# EAGLE board Cerdas F2 rev1 (EAGLE 9.0.1)
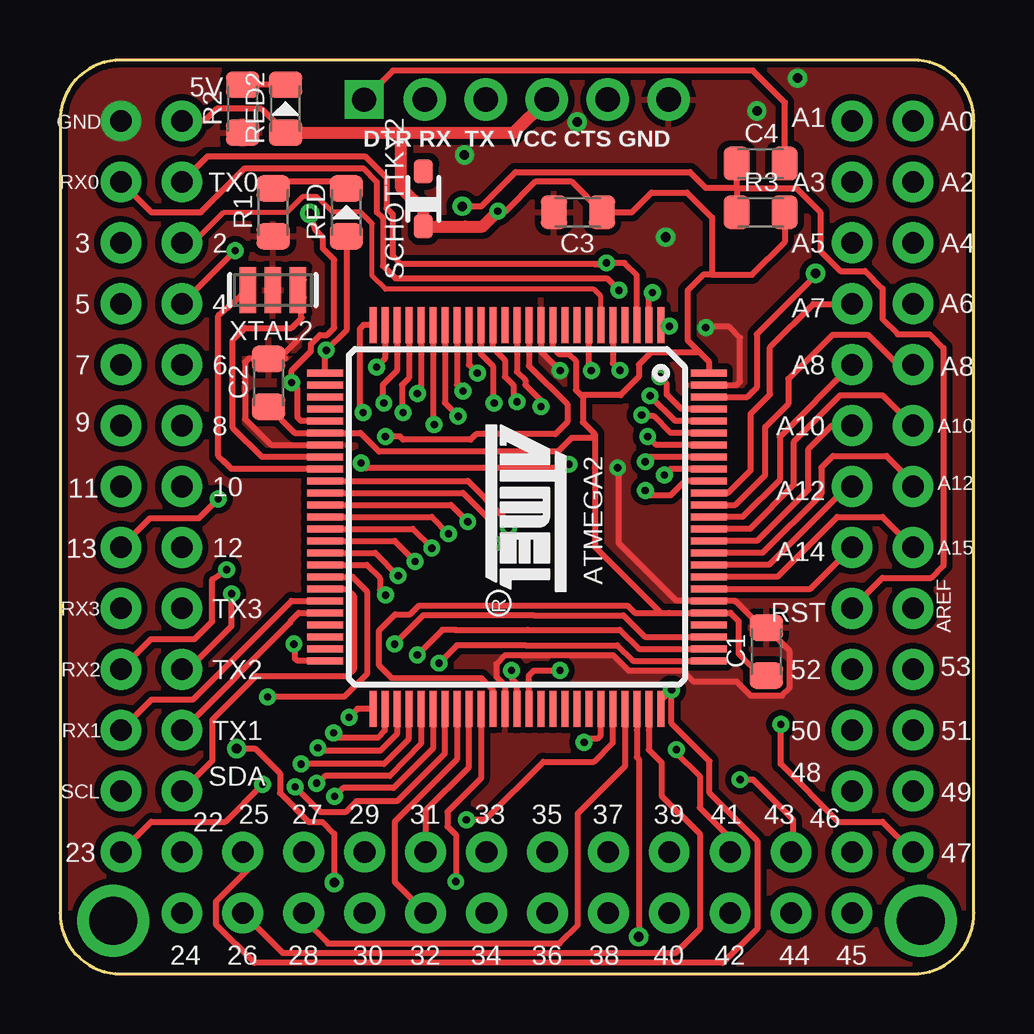
[diagram p0: board, top side]
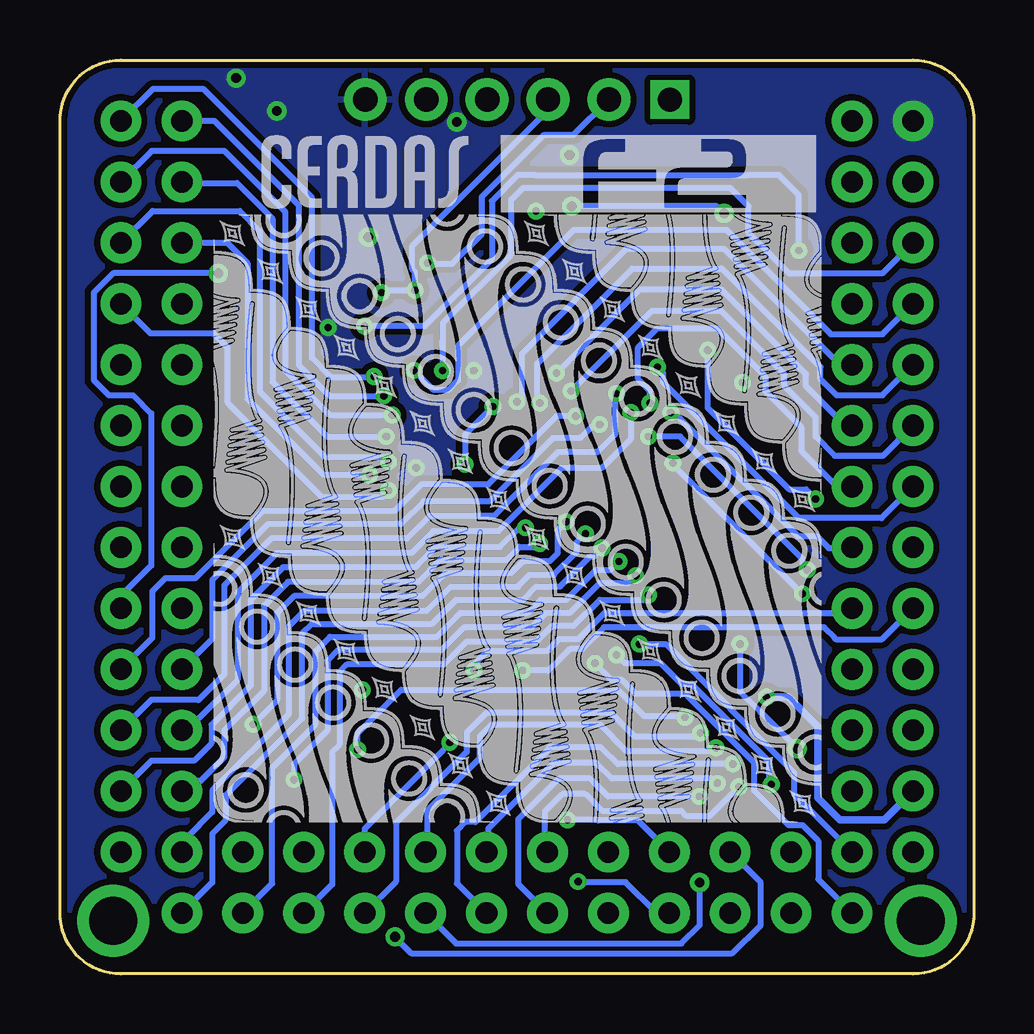
[diagram p1: board, bottom side, seen from below]

Size 38.1 x 38.1 mm. Coordinates in mm from the lower left corner, seen from the top.
Outline: 0,35.56 0,2.54 arc90 2.54,0 35.56,0 arc90 38.1,2.54 38.1,35.56 arc90 35.56,38.1 2.54,38.1 arc90 0,35.56
Copper layers (1*16): Top 0.035mm / dielectric 1.5mm / Bottom 0.035mm
Design rules "DFRobot_Eagle_Rule_v0.4": minimum track width 6mil, minimum drill 12mil, track to track 6mil, track to pad 6mil, pad to pad 6mil, via to via 6mil, smd to smd 0mil, copper to edge 10mil, drill to drill 10mil, minimum pad ring 12mil, minimum via ring 8mil, stop-mask expansion 2mil, vias tented up to drill 25mil, thermal gap 10mil

## Footprints (pad centres in the part's own frame; a part is rotated, then mirrored left to right if it is on the bottom)
TQFP100 = smd 1.5 x 0.3: 1 -8,6; 2 -8,5.5; 3 -8,5; 4 -8,4.5; 5 -8,4; 6 -8,3.5; 7 -8,3; 8 -8,2.5; 9 -8,2; 10 -8,1.5; 11 -8,1; 12 -8,0.5; 13 -8,0; 14 -8,-0.5; 15 -8,-1; 16 -8,-1.5; 17 -8,-2; 18 -8,-2.5; 19 -8,-3; 20 -8,-3.5; 21 -8,-4; 22 -8,-4.5; 23 -8,-5; 24 -8,-5.5; 25 -8,-6; 51 8,-6; 52 8,-5.5; 53 8,-5; 54 8,-4.5; 55 8,-4; 56 8,-3.5; 57 8,-3; 58 8,-2.5; 59 8,-2; 60 8,-1.5; 61 8,-1; 62 8,-0.5; 63 8,0; 64 8,0.5; 65 8,1; 66 8,1.5; 67 8,2; 68 8,2.5; 69 8,3; 70 8,3.5; 71 8,4; 72 8,4.5; 73 8,5; 74 8,5.5; 75 8,6 | smd 0.3 x 1.5: 26 -6,-8; 27 -5.5,-8; 28 -5,-8; 29 -4.5,-8; 30 -4,-8; 31 -3.5,-8; 32 -3,-8; 33 -2.5,-8; 34 -2,-8; 35 -1.5,-8; 36 -1,-8; 37 -0.5,-8; 38 0,-8; 39 0.5,-8; 40 1,-8; 41 1.5,-8; 42 2,-8; 43 2.5,-8; 44 3,-8; 45 3.5,-8; 46 4,-8; 47 4.5,-8; 48 5,-8; 49 5.5,-8; 50 6,-8; 76 6,8; 77 5.5,8; 78 5,8; 79 4.5,8; 80 4,8; 81 3.5,8; 82 3,8; 83 2.5,8; 84 2,8; 85 1.5,8; 86 1,8; 87 0.5,8; 88 0,8; 89 -0.5,8; 90 -1,8; 91 -1.5,8; 92 -2,8; 93 -2.5,8; 94 -3,8; 95 -3.5,8; 96 -4,8; 97 -4.5,8; 98 -5,8; 99 -5.5,8; 100 -6,8
SMD-0805 = smd 1.1 x 1.4: 1 -1,0; 2 1,0
SMD-0805-LED = smd 1.1 x 1.4: 1 -1,0; 2 1,0
SOD-323 = smd 1 x 0.8: A 1.15,0; C -1.15,0
CON-FTDI-NOSILK = drill 1.016 pad 1.778: CTS 3.81,0; GND 6.35,0; RXI -1.27,0; TX0 -3.81,0; VCC 1.27,0 | drill 1 square: DTR -6.35,0
CSTCE* = smd 0.7 x 1.905: 1 -1.041,0; 2 0,0; 3 1.041,0

## Placement (x,y rotation side)
ATMEGA2  ATMEGA2560  [TQFP100]  19.05,19.05 270 top
C1  [SMD-0805]  29.45,13.44 90 top
C2  .1uF  [SMD-0805]  8.69,24.64 90 top
C3  .1uF  [SMD-0805]  21.59,31.75 180 top
C4  .1uF  [SMD-0805]  29.21,33.78 0 top
R1  10k  [SMD-0805]  8.89,31.75 90 top
R2  10k  [SMD-0805]  7.62,36.07 90 top
R3  10k  [SMD-0805]  29.21,31.75 0 top
RED  L  [SMD-0805-LED]  11.94,31.75 90 top
RED2  L  [SMD-0805-LED]  9.4,36.07 90 top
SCHOTTKY2  DIODE  [SOD-323]  15.15,32.31 90 top
U$1  FRAME  [A4-HOR]  -0.25,-0.13 0 top
U$2  CON-FTDI-DIP-NOSILK  [CON-FTDI-NOSILK]  19.02,36.45 0 top
U$4  LOGO-CERDASF2-BPLACE  [CERDAS-F2-SILK]  6.35,6.35 0 top
XTAL2  16M  [CSTCE*]  8.87,28.51 180 top

## Library data of the parts
ATMEGA2 C1-C4 R1-R3 RED RED2 SCHOTTKY2 = Fuzzy
U$1 U$2 U$4 XTAL2 = geraicerdas

## Nets
2: ATMEGA2.6
3: ATMEGA2.7
4: ATMEGA2.1
5: ATMEGA2.5
6: ATMEGA2.15
7: ATMEGA2.16
8: ATMEGA2.17
9: ATMEGA2.18
10: ATMEGA2.23
11: ATMEGA2.24
12: ATMEGA2.25
13: ATMEGA2.26 RED.1
22: ATMEGA2.78
23: ATMEGA2.77
24: ATMEGA2.76
25: ATMEGA2.75
26: ATMEGA2.74
27: ATMEGA2.73
28: ATMEGA2.72
29: ATMEGA2.71
30: ATMEGA2.60
31: ATMEGA2.59
32: ATMEGA2.58
33: ATMEGA2.57
34: ATMEGA2.56
35: ATMEGA2.55
36: ATMEGA2.54
37: ATMEGA2.53
38: ATMEGA2.50
39: ATMEGA2.70
40: ATMEGA2.52
41: ATMEGA2.51
42: ATMEGA2.42
43: ATMEGA2.41
44: ATMEGA2.40
45: ATMEGA2.39
46: ATMEGA2.38
47: ATMEGA2.37
48: ATMEGA2.36
49: ATMEGA2.35
50: ATMEGA2.22
51: ATMEGA2.21
52: ATMEGA2.20
53: ATMEGA2.19
+5V: ATMEGA2.10 ATMEGA2.31 ATMEGA2.61 ATMEGA2.80 ATMEGA2.100 C1.1 C2.1 C3.1 R3.2 RED2.1 SCHOTTKY2.C U$2.VCC
A0: ATMEGA2.97
A1: ATMEGA2.96
A2: ATMEGA2.95
A3: ATMEGA2.94
A4: ATMEGA2.93
A5: ATMEGA2.92
A7: ATMEGA2.90
A8: ATMEGA2.89
A9: ATMEGA2.88
A10: ATMEGA2.87
A11: ATMEGA2.86
A12: ATMEGA2.85
A13: ATMEGA2.84
AREF: ATMEGA2.98
DTR: C4.2 U$2.DTR
GND: ATMEGA2.11 ATMEGA2.32 ATMEGA2.62 ATMEGA2.81 ATMEGA2.99 C1.2 C2.2 C3.2 R1.1 R2.1 U$2.GND XTAL2.2
GSM_PWR_ON: ATMEGA2.91
N$1: ATMEGA2.34 XTAL2.3
N$2: ATMEGA2.33 XTAL2.1
N$3: R1.2 RED.2
N$10: R2.2 RED2.2
RST: ATMEGA2.30 C4.1 R3.1
RX0: ATMEGA2.2 U$2.RXI
RX1: ATMEGA2.45
RX2: ATMEGA2.12
RX3: ATMEGA2.63
RX_GSM_H: ATMEGA2.83
SCL: ATMEGA2.43
SDA: ATMEGA2.44
TX0: ATMEGA2.3 U$2.TX0
TX1: ATMEGA2.46
TX2: ATMEGA2.13
TX3: ATMEGA2.64
TX_GSM_H: ATMEGA2.82
VUSB: SCHOTTKY2.A

## Tracks (layer width: path | path; a pad name or v marks a point on that pad's centre or on a via)
2  (via drill 0.9 pad 1.7)
  Top 0.2: ATMEGA2.6 22.55,28.25 22.25,28.55 13.56,28.55 13.02,29.09 13.02,31.28 12.54,31.75 11.36,31.75 10.71,32.41 10.12,32.41 9.46,31.75 6.83,31.75 5.56,30.48 v5.08,30.48
3  (via drill 0.3 pad 0.5, 0.9 pad 1.7)
  Top 0.25: ATMEGA2.7 22.05,25.25 v22.15,25.15
  Bottom 0.25: 7.7,29.2 3.82,29.2 v2.54,30.48 | 22.05,25.25 v22.15,25.15 22.15,26.16 22.15,26.4
  Bottom 0.254: 7.7,29.2 9.4,30.9 9.4,32 10.16,32.77 18.8,32.77 19.3,32.26 19.3,29.97 22.15,27.13 22.15,26.16
4  (via drill 0.3 pad 0.5, 0.9 pad 1.7)
  Top 0.25: v25.4,27 25.1,27 ATMEGA2.1
  Top 0.254: v5.08,27.94 v5.09,27.94 v7.3,30.15
  Bottom 0.25: v25.4,27 22.9,27 20.1,29.8 20.1,31.24 20.1,31.5 | 18.3,33.3 18.29,33.3 9.43,33.3
  Bottom 0.254: 9.43,33.3 8.13,33.3 7.3,32.47 v7.3,30.15 | 18.29,33.3 19.02,33.3 20.1,32.22 20.1,31.24
5  (via drill 0.3 pad 0.5, 0.9 pad 1.7)
  Top 0.25: ATMEGA2.5 23.05,26.05
  Top 0.254: 23.05,26.05 23.05,25.46 v23.35,25.16
  Bottom 0.25: 21.9,24.35 21.5,24.75 21.5,26.2 16.68,31.02 10.32,31.02 5.97,26.67 3.81,26.67 v2.54,27.94
  Bottom 0.254: 21.9,24.35 22.53,24.35 v23.35,25.16
6  (via drill 0.3 pad 0.5, 0.9 pad 1.7)
  Top 0.25: v19.05,23.85 18.9,24 18.9,24.55 18.55,24.9 18.55,25.6 18.05,26.1 ATMEGA2.15
  Bottom 0.25: v5.08,25.4 5.6,25.4 10.43,30.23 14.48,30.23 18.85,25.86 18.85,24.05 v19.05,23.85
7  (via drill 0.3 pad 0.5, 0.9 pad 1.7)
  Top 0.25: ATMEGA2.16 17.55,25.85 18.05,25.35 18.05,23.85 v18.1,23.8
  Bottom 0.25: v18.1,23.8 18.2,23.9 18.2,25.45 14.24,29.41 10.51,29.41 6.4,25.3 6.4,24.8 5.73,24.13 3.81,24.13 v2.54,25.4
8  (via drill 0.3 pad 0.5, 0.9 pad 1.7)
  Top 0.25: ATMEGA2.17 17.05,25.4 v17.4,25.05
  Bottom 0.25: v5.08,22.86 5.36,22.86 7,24.5 7,25 10.54,28.54 13.92,28.54 15.89,26.57 15.89,26.56 v17.4,25.05
9  (via drill 0.3 pad 0.5, 0.9 pad 1.7)
  Top 0.25: ATMEGA2.18 16.55,24.55 v16.8,24.3
  Bottom 0.25: v16.8,24.3 15.2,25.9 15.18,25.9 13.43,27.65 10.55,27.65 7.9,25 7.9,24.5 6.6,23.2 6.6,22.4 5.8,21.6 3.8,21.6 v2.54,22.86
10  (via drill 0.3 pad 0.5, 0.9 pad 1.7)
  Top 0.25: ATMEGA2.23 14.05,25.15 13.45,24.55 13.45,23.85 v13.5,23.8
  Bottom 0.25: v13.5,23.8 13.5,24.3 14,24.8 14,26.12 13.2,26.92 10.72,26.92 8.7,24.9 8.7,24.3 7.2,22.8 7.2,21.8 5.7,20.3 5.1,20.3 v5.08,20.32
11  (via drill 0.3 pad 0.5, 0.9 pad 1.7)
  Top 0.25: ATMEGA2.24 13.55,25.65 v13.2,25.3 13.15,25.35
  Bottom 0.25: v13.2,25.3 12.95,25.05 12.95,24.65 7.3,19 3.86,19 v2.54,20.32
12  (via drill 0.3 pad 0.5, 0.9 pad 1.7)
  Top 0.25: ATMEGA2.25 12.65,27.05 12.5,26.9 12.5,23.3
  Top 0.254: v12.64,23.41 12.5,23.29 12.5,23.3
  Bottom 0.25: 12.05,22.95 7.35,18.25 6.55,18.25 6.05,17.75 5.11,17.75 v5.08,17.78
  Bottom 0.254: 12.05,22.95 12.25,23.15 v12.64,23.41
13  (via drill 0.3 pad 0.5, 0.9 pad 1.7)
  Top 0.25: v2.54,17.78 3.76,19 5.8,19 v6.6,19.8 | ATMEGA2.26 11.05,25.95 v11.1,26
  Top 0.254: RED.1 11.94,26.84 v11.1,26
  Bottom 0.25: 11.2,25.9 v11.1,26 11.1,23.6 7.7,20.2 7,20.2 v6.6,19.8
22  (via drill 0.3 pad 0.5, 0.9 pad 1.7)
  Top 0.25: 24.38,14.05 ATMEGA2.78 | 19.75,14.95 15.65,14.95
  Top 0.254: 19.75,14.95 23.48,14.95 24.38,14.05 | 15.65,14.95 15.14,14.95 v13.94,13.75
  Bottom 0.25: v13.94,13.75 12.85,13.75 | 7.5,8.38 7.5,7.5 v5.08,5.08
  Bottom 0.254: 12.85,13.75 7.5,8.4 7.5,8.38
23  (via drill 0.3 pad 0.5, 0.9 pad 1.7)
  Top 0.25: 24.13,13.55 ATMEGA2.77 | 16.45,14.35 16.51,14.35 19.5,14.35 | v2.54,5.08 3.81,6.35 6.9,6.35 v8.45,7.9
  Top 0.254: 19.5,14.35 23.33,14.35 24.13,13.55 | 16.51,14.35 15.94,14.35 v14.9,13.3
  Bottom 0.25: 8.55,8.38 8.55,8 v8.45,7.9
  Bottom 0.254: 8.55,8.38 8.55,8.87 11.77,12.09 12.19,12.09 13.05,12.95 14.54,12.95 v14.9,13.3
24  (via drill 0.3 pad 0.5, 0.9 pad 1.7)
  Top 0.25: 23.88,13.05 ATMEGA2.76 | 19.4,13.7 16.55,13.7
  Top 0.254: 19.4,13.7 23.23,13.7 23.88,13.05 | 16.55,13.7 16.54,13.7 v15.8,12.95
  Bottom 0.254: v5.08,2.54 6.49,3.95 6.49,5.55 7.15,6.21 7.73,6.21 9.17,7.64 9.17,8.81 11.94,11.58 11.94,11.68 14.11,11.68 14.68,12.25 15.1,12.25 v15.8,12.95
25  (via drill 0.3 pad 0.5, 0.9 pad 1.7)
  Top 0.25: ATMEGA2.75 25.05,11.4 v25.5,11.85
  Top 0.254: v25.5,11.85 25.5,10.45 27.07,8.87 27.07,7.54 29.07,5.55 29.07,1.89 27.63,0.46 8.11,0.46 6.49,2.07 6.49,3.01 8.09,4.61 v7.62,5.08
26  (via drill 0.9 pad 1.7)
  Top 0.25: ATMEGA2.74 24.55,10.16
  Top 0.254: v7.62,2.54 9.3,0.86 25.65,0.86 26.67,1.88 26.67,5.84 25.08,7.43 25.08,8.81 24.55,9.34 24.55,10.16
27  (via drill 0.4, 0.9 pad 1.7)
  Top 0.25: ATMEGA2.73 24.05,10.16
  Top 0.254: v24.13,1.55 24.13,8.95 24.05,9.03 24.05,10.16
  Bottom 0.254: 24.13,1.52 v24.13,1.55 | 23.88,1.27 arc90 24.13,1.52 | 23.88,1.27 24.13,1.52 | 23.88,1.27 23.47,0.86 10.06,0.86 8.89,2.03 8.89,3.81 v10.16,5.08
28  (via drill 0.9 pad 1.7)
  Top 0.25: ATMEGA2.72 23.55,8.65 22.18,7.28 22.1,7.2
  Top 0.254: v10.16,2.54 10.16,2.29 11.18,1.27 20.83,1.27 21.59,2.03 21.59,6.69 22.18,7.28
29  (via drill 0.3 pad 0.5, 0.9 pad 1.7)
  Top 0.25: ATMEGA2.71 23.05,9.65 22.25,8.85 20.15,8.85 17.72,6.42 v16.94,6.42
  Bottom 0.254: v12.7,5.08 14.02,6.4 15.67,6.4 15.69,6.42 v16.94,6.42
30  (via drill 0.3 pad 0.5, 0.9 pad 1.7)
  Top 0.25: 16.45,3.9 v16.5,3.85 16.5,5.8 16.15,6.15 16.15,6.75 17.55,8.15 ATMEGA2.60
  Bottom 0.25: v12.7,2.54 13.24,2.54 14.52,3.82 16.47,3.82 v16.5,3.85
31  (via drill 0.9 pad 1.7)
  Top 0.25: 15.2,5.12 v15.24,5.08 15.24,6.81 17.05,8.62 ATMEGA2.59
32  (via drill 0.9 pad 1.7)
  Top 0.25: ATMEGA2.58 16.55,8.95 13.95,6.35 13.95,3.83 v15.24,2.54
33  (via drill 0.3 pad 0.5, 0.9 pad 1.7)
  Top 0.25: ATMEGA2.57 16.05,9.2 14.05,7.2 12.36,7.2 11.9,6.74 10.86,6.74 v9.8,7.8
  Bottom 0.25: v17.78,5.08 17.9,5.2 17.9,6.75 17.15,7.5 16.2,7.5 15.5,6.8 12.2,6.8 12,6.6 11,6.6 v9.8,7.8
34  (via drill 0.3 pad 0.5, 0.9 pad 1.7)
  Top 0.25: ATMEGA2.56 15.55,9.4 13.9,7.75 11.8,7.75 v11.45,7.4 11.5,7.45
  Bottom 0.25: v11.45,7.4 15.25,7.4 16,8.15 17.3,8.15 19,6.45 19,3.76 v17.78,2.54
35  (via drill 0.3 pad 0.5, 0.9 pad 1.7)
  Top 0.25: ATMEGA2.55 15.05,9.6 13.75,8.25 11.05,8.25 v10.7,7.95
  Bottom 0.25: v20.32,5.08 20.25,5.15 20.25,6.05 17.5,8.8 15.75,8.8 15.1,8.15 10.9,8.15 v10.7,7.95
36  (via drill 0.3 pad 0.5, 0.9 pad 1.7)
  Top 0.25: v10.05,8.75 13.5,8.75 14.55,9.8 ATMEGA2.54
  Bottom 0.25: v10.05,8.75 14.85,8.75 15.55,9.45 17.7,9.45 17.7,9.41 20.78,6.33 21.19,6.33 21.55,5.97 21.55,3.77 v20.32,2.54
37  (via drill 0.3 pad 0.5, 0.9 pad 1.7)
  Top 0.25: ATMEGA2.53 14.05,10 13.35,9.3 10.95,9.3 v10.75,9.42
  Bottom 0.25: v22.86,5.08 22.8,5.14 22.8,6.8 20.6,9 20.6,9.9 20.1,10.4 15.6,10.4 14.5,9.3 10.95,9.3 v10.75,9.42
38  (via drill 0.3 pad 0.5, 0.4, 0.9 pad 1.7)
  Top 0.25: ATMEGA2.50 9.9,13.05 9.8,13.15 9.8,13.7 v9.75,13.75
  Top 0.254: v7.37,9.4 8.13,9.4 9.17,8.36 9.17,7.54 10.37,6.33 10.94,6.33 11.43,5.84 v11.43,3.81
  Bottom 0.254: v7.37,9.4 8.89,10.92 8.91,10.92 9.75,11.76 v9.75,13.75 | v22.86,2.54 21.59,1.27 12.19,1.27 11.43,2.03 v11.43,3.81
39  (via drill 0.3 pad 0.5, 0.9 pad 1.7)
  Top 0.25: v21.85,9.65 22,9.8 22.4,9.8 22.55,9.95 ATMEGA2.70
  Bottom 0.25: v21.85,9.65 22.15,9.3 25.4,6.05 v25.4,5.08
40  (via drill 0.3 pad 0.5, 0.9 pad 1.7)
  Top 0.25: v11.4,10.05 11.6,9.85 13.25,9.85 13.55,10.15 ATMEGA2.52
  Bottom 0.25: v25.4,2.54 24.1,3.84 24.1,6.3 21.15,9.25 21.15,10.05 20.3,10.9 15.15,10.9 14.15,9.9 11.55,9.9 v11.4,10.05
41  (via drill 0.3 pad 0.5, 0.9 pad 1.7)
  Top 0.25: ATMEGA2.51 12.4,11.05 v12.05,10.7 | v27.94,5.08 27.94,5.66 26.67,6.93 26.67,8.26 25.7,9.23 v25.7,9.35
  Bottom 0.25: v12.05,10.7 12.1,10.75 13.75,10.75 14.85,11.85 23.88,11.85 | 25.6,9.45 v25.7,9.35
  Bottom 0.254: v25.7,9.35 25.7,10.03 23.88,11.85
42  (via drill 0.3 pad 0.5, 0.9 pad 1.7)
  Top 0.25: ATMEGA2.42 12.79,17.05 13.34,16.5 13.34,16.02 v13.57,15.79
  Bottom 0.25: v27.94,2.54 26.75,3.73 26.75,9.25 26.45,9.55 26.45,12.6 26.15,12.9 22.1,12.9 21.15,13.85 18.25,13.85 17.6,14.5 16.7,14.5 15.6,15.6 13.76,15.6 v13.57,15.79
43  (via drill 0.3 pad 0.5, 0.9 pad 1.7)
  Top 0.25: ATMEGA2.41 13.15,17.55 v14.1,16.6 14.05,16.65 | v30.48,5.08 30.55,5.15 30.55,6.45 28.9,8.1 v28.35,8.1
  Bottom 0.25: v28.35,8.1 28.35,8.75 26.95,10.15 26.95,13.05 26.5,13.5 22.2,13.5 21.25,14.45 18.45,14.45 17.85,15.05 16.85,15.05 15.6,16.3 14.4,16.3 v14.1,16.6
44  (via drill 0.3 pad 0.5, 0.9 pad 1.7)
  Top 0.25: ATMEGA2.40 13.95,18.05 v14.8,17.2 14.75,17.25
  Bottom 0.25: v14.8,17.2 15.15,16.85 15.75,16.85 17,15.6 18.05,15.6 18.6,15.05 21.4,15.05 22.4,14.05 26.85,14.05 27.45,13.45 27.45,10.4 29.25,8.6 29.25,3.77 v30.48,2.54
45  (via drill 0.3 pad 0.5, 0.9 pad 1.7)
  Top 0.25: ATMEGA2.39 14.7,18.55 v15.5,17.75
  Bottom 0.25: v33.02,2.54 31.75,3.81 31.75,5.85 31.2,6.4 31.2,7.45 28,10.65 28,14.2 27.6,14.6 22.6,14.6 21.6,15.6 18.8,15.6 18.25,16.15 17.25,16.15 16,17.4 15.85,17.4 v15.5,17.75
46  (via drill 0.3 pad 0.5, 0.9 pad 1.7)
  Top 0.25: ATMEGA2.38 15.5,19.05 v16.2,18.35
  Bottom 0.25: 32.9,5.2 v33.02,5.08 32.8,5.3 32.8,5.7 31.75,6.75 31.75,7.65 28.55,10.85 28.55,14.5 27.9,15.15 22.8,15.15 21.8,16.15 19,16.15 18.5,16.65 17.5,16.65 16.55,17.6 16.55,18 v16.2,18.35
47  (via drill 0.3 pad 0.5, 0.9 pad 1.7)
  Top 0.25: ATMEGA2.37 16.3,19.55 v17,18.85 | v35.56,5.08 34.29,6.35 32.45,6.35 30.05,8.75 v30.05,10.4
  Bottom 0.25: v30.05,10.4 29.05,11.4 29.05,15.05 28.35,15.75 23,15.75 22.05,16.7 19.3,16.7 18.8,17.2 17.7,17.2 17.35,17.55 17.35,18.5 v17,18.85
48  (via drill 0.3 pad 0.5, 0.9 pad 1.7)
  Top 0.25: ATMEGA2.36 16.8,20.05 17.95,18.9 17.95,18.1 v18.1,17.95
  Bottom 0.25: v18.1,17.95 18.25,17.8 18.95,17.8 19.5,17.25 22.25,17.25 23.15,16.35 28.6,16.35 29.6,15.35 29.6,11.8 31.25,10.15 31.25,9.03 32.24,8.04 32.6,8.04 v33.02,7.62
49  (via drill 0.3 pad 0.5, 0.9 pad 1.7)
  Top 0.25: ATMEGA2.35 17,20.55 18.45,19.1 18.45,18.85 v18.7,18.6
  Bottom 0.25: v18.7,18.6 18.95,18.6 19.75,17.8 22.45,17.8 23.3,16.95 28.8,16.95 30.15,15.6 30.15,12.02 31.78,10.39 31.78,9.62 32.51,8.89 34.29,8.89 v35.56,7.62
50  (via drill 0.3 pad 0.5, 0.9 pad 1.7)
  Top 0.25: ATMEGA2.22 14.55,24.85 14.25,24.55 14.25,23.45 v14.3,23.4
  Bottom 0.25: v14.3,23.4 14.3,22.3 15.5,21.1 17.2,21.1 19.85,18.45 22.55,18.45 23.45,17.55 29.05,17.55 30.7,15.9 30.7,12.26 32.5,10.46 32.72,10.46 v33.02,10.16
51  (via drill 0.3 pad 0.5, 0.9 pad 1.7)
  Top 0.25: 15,24.3 v14.9,24.2 15.05,24.35 ATMEGA2.21
  Bottom 0.25: 35.54,10.16 v35.56,10.16 34.29,11.43 34.28,11.42 32.32,11.42 31.25,12.49 31.25,16.2 29.3,18.15 23.65,18.15 22.7,19.1 20,19.1 17.35,21.75 15.7,21.75 14.95,22.5 14.95,24.15 v14.9,24.2
52  (via drill 0.3 pad 0.5, 0.9 pad 1.7)
  Top 0.25: 15.5,23 v15.6,22.9 15.55,22.95 ATMEGA2.20
  Bottom 0.25: v15.6,22.9 15.85,22.9 16.4,22.35 17.55,22.35 20.2,19.7 22.95,19.7 23.9,18.75 29.43,18.75 31.75,16.43 31.75,13.97 v33.02,12.7
53  (via drill 0.3 pad 0.5, 0.9 pad 1.7)
  Top 0.25: ATMEGA2.19 16.05,23.8 v16.6,23.25
  Bottom 0.25: v16.6,23.25 17.4,23.25 20.25,20.4 23.05,20.4 24.15,19.3 29.66,19.3 32.47,16.49 33.71,16.49 34.25,15.95 34.25,14.01 v35.56,12.7
+5V  (via drill 0.3 pad 0.5, 0.9 pad 1.7)
  Top 0.25: 25.4,15.05 25.05,15.05 22.3,17.8 22.3,21.1 | 20.55,26.1 20.8,25.85 21.2,25.85 21.5,25.55 21.5,24.35 21.65,24.2 21.8,24.05 21.8,23 22,22.8 | R3.2 30.21,30.51 28.85,29.15 27.18,29.15 26.82,29.15 26.31,28.64 | C1.1 29.21,12.44 28.3,13.35 28.3,14.7 27.95,15.05 | 26.67,25.91 27.05,25.53 | 5.1,35.54 v5.08,35.56
  Top 0.254: 22.3,22.5 22,22.8 | 22.3,22.5 22.3,21.1 | 26.31,28.64 26.16,28.49 26.16,26.42 26.67,25.91 | 21.65,24.2 21.72,24.13 23.37,24.13 24.13,24.89 24.13,25.4 24.64,25.91 26.67,25.91 27.05,25.53 ATMEGA2.100 | 27.18,29.15 27.18,30.06 27.18,31.53 26.14,32.58 24.66,32.58 23.84,31.75 C3.1 22.59,31.77 21.34,33.02 19.81,33.02 18.58,31.79 v18.25,31.79 | 22.3,22.5 22.15,22.35 21.34,22.35 20.76,21.77 13.3,21.77 12.53,22.55 ATMEGA2.31 9.79,22.55 C2.1 | RED2.1 8.4,36.07 6.54,36.07 6.03,35.56 5.12,35.56 5.1,35.54 | 20.55,26.1 ATMEGA2.10 | ATMEGA2.61 18.05,11.85 17.57,12.32 13.84,12.32 13.31,12.85 13.31,14.33 13.97,14.99 14.6,14.99 14.97,15.36 23.65,15.36 23.96,15.05 25.4,15.05 ATMEGA2.80 27.95,15.05
  Top 0.5: SCHOTTKY2.C 16.89,31.16
  Top 0.508: SCHOTTKY2.C 15.15,31.84 14.22,32.77 14.22,34.93 14.36,35.07 | RED2.1 14.36,35.07 | 16.89,31.16 17.62,31.16 v18.25,31.79 | U$2.VCC 18.91,35.07 14.36,35.07
A0  (via drill 0.3 pad 0.5, 0.9 pad 1.7)
  Top 0.25: ATMEGA2.97 25.9,23.55 25.3,24.15 25.3,24.6 v25,24.9
  Bottom 0.25: v35.56,35.56 34.22,36.9 32.13,36.9 27.6,32.37 27.6,25.68 26.81,24.89 v25.01,24.89 v25,24.9
A1  (via drill 0.3 pad 0.5, 0.9 pad 1.7)
  Top 0.25: ATMEGA2.96 25.65,23.05 v24.6,24.1
  Bottom 0.25: v33.02,35.56 31.67,35.56 28.15,32.04 28.15,25.39 26.86,24.1 v24.6,24.1 v24.61,24.09
A2  (via drill 0.3 pad 0.5, 0.9 pad 1.7)
  Top 0.25: ATMEGA2.95 25.45,22.55 24.75,23.25 24.3,23.25 v24.25,23.3
  Bottom 0.25: v35.56,33.02 34.28,34.3 31.24,34.3 28.71,31.77 28.71,25.15 26.86,23.3 v24.25,23.3
A3  (via drill 0.3 pad 0.5, 0.9 pad 1.7)
  Top 0.25: ATMEGA2.94 24.85,22.05 v24.5,22.4
  Bottom 0.25: v33.02,33.02 32.97,32.97 30.72,32.97 29.24,31.49 29.24,24.68 26.96,22.4 v24.5,22.4
A4  (via drill 0.3 pad 0.5, 0.9 pad 1.7)
  Top 0.25: ATMEGA2.93 24.45,21.55 v24.4,21.35
  Bottom 0.25: v35.56,30.48 34.24,31.8 30.6,31.8 29.77,30.97 29.77,24.27 ATMEGA2.93 24.6,21.55 v24.4,21.35
A5  (via drill 0.3 pad 0.5, 0.9 pad 1.7)
  Top 0.25: 25.4,21 v25.2,20.8 25.45,21.05 ATMEGA2.92
  Bottom 0.25: v33.02,30.48 31.13,30.48 30.28,29.63 30.28,23.97 27.11,20.8 v25.2,20.8
A7  (via drill 0.9 pad 1.7)
  Top 0.25: ATMEGA2.90 27.85,20.05 28.8,21 28.8,23.36 29.6,24.16 29.6,26.13 31.4,27.93 33.01,27.93 v33.02,27.94
A8  (via drill 0.9 pad 1.7)
  Top 0.25: ATMEGA2.89 28.15,19.55 29.4,20.8 29.4,22.8 30.36,23.76 30.36,24.8 32.21,26.65
  Top 0.254: 32.21,26.65 33.67,26.65 34.92,25.4 v35.56,25.4
A9  (via drill 0.9 pad 1.7)
  Top 0.25: v33.02,25.4 30,22.38 30,20.6 28.45,19.05 ATMEGA2.88
A10  (via drill 0.9 pad 1.7)
  Top 0.25: v35.56,22.86 34.29,24.13 32.53,24.13 30.6,22.2 30.6,20.4 28.75,18.55 ATMEGA2.87
A11  (via drill 0.9 pad 1.7)
  Top 0.25: ATMEGA2.86 29.05,18.05 31.2,20.2 31.2,21.89 32.16,22.85 33.01,22.85 v33.02,22.86
A12  (via drill 0.9 pad 1.7)
  Top 0.25: v35.56,20.32 35.56,20.49 34.45,21.6 32.22,21.6 31.73,21.11 31.73,19.99 29.29,17.55 ATMEGA2.85
A13  (via drill 0.9 pad 1.7)
  Top 0.25: v33.02,20.32 32.7,20 32.5,20 29.55,17.05 ATMEGA2.84
AREF  (via drill 0.4, 0.9 pad 1.7)
  Top 0.25: ATMEGA2.98 28.65,24.05 28.84,24.24
  Top 0.254: v31.5,29.21 31.5,29.12 29.05,26.67 29.05,24.45 28.84,24.24
  Bottom 0.254: v35.56,15.24 35.56,15.75 34.29,17.02 34.29,23.37 35.05,24.13 36.07,24.13 36.69,24.75 36.69,28.41 35.89,29.21 v31.5,29.21
DTR
  Top 0.254: C4.2 30.23,33.8 30.23,36.32 28.89,37.66 13.88,37.66 U$2.DTR
GND  (via drill 0.3 pad 0.5, 0.4 pad 0.5, 0.9 pad 1.7)
  Top 0.25: ATMEGA2.99 28.2,24.55 28.35,24.7 28.35,26.51 27.88,26.98 26.95,26.98 v26.92,26.95 | v23.25,21.1 23.3,21.05 23.3,17.95 25.7,15.55 ATMEGA2.81 28.15,15.55 29.26,14.44 C1.2 | ATMEGA2.11 20.05,25.95 v20.85,25.15
  Top 0.254: XTAL2.2 8.87,28.18 | C2.2 7.87,25.65 7.71,25.49 7.71,23.14 8.8,22.05 ATMEGA2.32 | C2.2 9.13,25.64 9.91,26.42 | 9.4,25.65 C2.2 | ATMEGA2.62 18.55,12.03 18.19,12.38 18.19,12.91 18.56,13.28 23.07,13.28 23.71,12.64 24.04,12.64 24.05,12.65 25.96,12.65 26.42,12.19 28.2,12.19 28.79,11.61 30.1,11.61 30.42,11.93 30.42,13.46 C1.2
  other vias: 2.54,35.56 16.86,34.14 25.24,30.71 21.56,35.51 29.05,35.97 30.76,37.34
  pour Top (isolate 0.254): 35.1,38.1 3,38.1 arc90 0,35.1 0,3 arc90 3,0 35.1,0 arc90 38.1,3 38.1,35.1 arc90
  pour Bottom (isolate 0.254): 35.1,38.1 3,38.1 arc90 0,35.1 0,3 arc90 3,0 35.1,0 arc90 38.1,3 38.1,35.1 arc90
GSM_PWR_ON  (via drill 0.3 pad 0.5, 0.9 pad 1.7)
  Top 0.25: v24.4,20.15 24.6,19.95 25.45,19.95 26.05,20.55 ATMEGA2.91
  Bottom 0.25: v35.56,27.94 34.32,26.7 31.69,26.7 31.13,26.14 31.13,23.82 27.19,19.88 24.67,19.88 v24.4,20.15
N$1
  Top 0.25: ATMEGA2.34 9.85,21.05 | 6.86,21.34 6.8,21.4
  Top 0.254: XTAL2.3 6.6,27.44 6.6,21.6 6.86,21.34 7.15,21.05 9.85,21.05
N$2
  Top 0.25: ATMEGA2.33 8.8,21.55
  Top 0.254: 10.16,28.19 10.16,28.93 XTAL2.1 10.07,27.35 9.65,26.92 7.71,26.92 7.21,26.42 7.21,22.77 8.42,21.55 8.8,21.55
N$3
  Top 0.254: RED.2 11.67,33.02 9.16,33.02 R1.2
N$10
  Top 0.254: RED2.2 R2.2
N$11  (via drill 2 pad 2.8)
  other vias: 35.88,2.22
N$12  (via drill 2 pad 2.8)
  other vias: 2.22,2.22
RST  (via drill 0.3 pad 0.5, 0.4, 0.9 pad 1.7)
  Top 0.25: ATMEGA2.30 10.05,23.05 9.9,23.2 9.9,24.4 v9.65,24.65
  Top 0.254: 28.21,32.77 C4.1 | 28.21,32.77 R3.1 | v9.65,24.65 9.65,25.12 9.67,25.14 9.67,25.17 10.47,25.96 10.47,26.26 10.84,26.63 11.14,26.63 11.43,26.92 11.43,29.77 10.96,30.25 10.96,30.7 10.67,30.99 v10.41,31.7 | v16.76,32 17.57,32 18.99,33.43 26.26,33.43 26.92,32.77 28.19,32.77 | 28.19,32.77 28.21,32.77 | v33.02,15.24 34.29,16.51 36.32,16.51 36.83,17.02 36.83,26.1 36.26,26.67 34.92,26.67 34.29,27.31 34.29,28.58 33.56,29.3 32.53,29.3 31.69,30.14 31.69,31.75 30.71,32.73 28.23,32.73 28.19,32.77
  Bottom 0.254: v10.41,31.7 10.72,32 v16.76,32
RX0  (via drill 0.3 pad 0.5, 0.9 pad 1.7)
  Top 0.25: ATMEGA2.2 24.55,28.25 v24.7,28.4 | 13.99,29 22.8,29 v23.3,28.5 | 5.87,31.75 3.81,31.75 v2.54,33.02
  Top 0.254: 5.87,31.75 7.7,33.58 12.65,33.58 13.21,33.02 13.21,31.75 13.46,31.5 13.46,29.53 13.99,29
  Bottom 0.25: v23.3,28.5 24.6,28.5 v24.7,28.4
  Bottom 0.254: v23.3,28.5 23.3,29.26 23.41,29.38 23.41,30.34 17.75,36 U$2.RXI
RX1  (via drill 0.9 pad 1.7)
  Top 0.25: ATMEGA2.45 9.65,15.55 5.53,11.43 3.81,11.43 v2.54,10.16
RX2  (via drill 0.3 pad 0.5, 0.9 pad 1.7)
  Top 0.25: ATMEGA2.12 19.55,25.35 21.15,23.75 21.15,23 20.65,22.5 17.35,22.5 | v6.95,16.85 6.35,16.45 6.35,14.7 5.6,13.95 3.79,13.95 v2.54,12.7
  Top 0.254: 13.77,22.4 v13.57,22.4 14.17,22.4 14.31,22.27 17.12,22.27 17.35,22.5
  Bottom 0.25: 12,22.15 7.15,17.3 7.15,17.05 v6.95,16.85
  Bottom 0.254: 12,22.15 12.25,22.4 v13.57,22.4
RX3  (via drill 0.3 pad 0.5, 0.9 pad 1.7)
  Top 0.25: ATMEGA2.63 19.05,12.1
  Top 0.254: 19.05,12.1 18.82,12.33 v18.82,12.65
  Bottom 0.25: 16.95,13.45 17.3,13.1 | 15,14.45 6.25,14.45 5.8,14 5.8,13.99 5.76,13.95 3.83,13.95 v2.54,15.24
  Bottom 0.254: 17.3,13.1 17.75,12.65 v18.82,12.65 | 15,14.45 15.43,14.45 16.33,13.55 16.85,13.55 16.95,13.45
RX_GSM_H  (via drill 0.9 pad 1.7)
  Top 0.25: v35.56,17.78 34.29,19.05 32.4,19.05 29.9,16.55 ATMEGA2.83
SCL  (via drill 0.3 pad 0.5, 0.9 pad 1.7)
  Top 0.25: ATMEGA2.43 12.2,16.55 12.8,15.95 12.8,12.5 11.85,11.55 v8.65,11.55
  Bottom 0.25: 8.45,11.55 v8.65,11.55
  Bottom 0.305: v8.65,11.55 7.74,11.55 6.51,10.32 6.51,7.34 5.58,6.41 3.75,6.41 v2.54,7.62
SDA  (via drill 0.9 pad 1.7)
  Top 0.25: ATMEGA2.44 11.95,16.05 12.25,15.75 12.25,12.7 11.95,12.4 8.15,12.4 6.35,10.6 6.35,8.89 v5.08,7.62
TX0  (via drill 0.3 pad 0.5, 0.9 pad 1.7)
  Top 0.25: ATMEGA2.3 24.05,28.85 | 22.5,29.6 22.26,29.6 14.22,29.6
  Top 0.254: v5.08,33.02 6.15,34.09 12.72,34.09 13.61,33.19 13.61,31.92 13.87,31.66 13.87,29.96 14.22,29.6 | 24.05,28.85 24.05,29.13 23.54,29.64 v22.78,29.64 22.74,29.6 22.26,29.6
  Bottom 0.254: v22.78,29.64 22.75,29.61 21.75,29.61 20.51,30.85 20.51,32.39 17.92,34.98 16.69,34.98 U$2.TX0
TX1  (via drill 0.9 pad 1.7)
  Top 0.25: v5.08,10.16 5.08,10.18 5.13,10.18 9.6,14.65 9.6,14.7 9.95,15.05 ATMEGA2.46
TX2  (via drill 0.3 pad 0.5, 0.9 pad 1.7)
  Top 0.25: ATMEGA2.13 19.05,25.1 19.4,24.75 19.4,24.55 20.05,23.9 v20.05,23.65 | v7.15,15.85 7.15,14.5 5.35,12.7 v5.08,12.7
  Top 0.254: v21.22,21.25 21.05,21.08 12.77,21.08 v12.55,21.3
  Bottom 0.25: 20.2,23.5 v20.05,23.65 | v12.55,21.3 12.4,21.3 12.4,21.1 v7.15,15.85
  Bottom 0.254: v20.05,23.65 21.22,22.48 v21.22,21.25
TX3  (via drill 0.3 pad 0.5, 0.9 pad 1.7)
  Top 0.254: ATMEGA2.64 19.55,12.44 19.76,12.65 v20.84,12.65
  Bottom 0.25: 5.14,15.3 v5.08,15.24 5.27,15.05 15.4,15.05 16.5,13.95 17.3,13.95
  Bottom 0.254: 17.3,13.95 17.8,13.45 20.29,13.45 20.84,12.9 v20.84,12.65
TX_GSM_H  (via drill 0.9 pad 1.7)
  Top 0.25: ATMEGA2.82 31.29,16.05 v33.02,17.78

## Text on the board
tPlace: 5V | A1 | GND | DTR RX TX VCC CTS GND | A0 | RX0 | TX0 | A3 | A2 | 3 | 2 | A5 | A4 | 5 | 4 | A7 | A6 | 7 | 6 | A8 | A8 | 9 | 8 | A10 | A10 | 11 | 10 | A12 | A12 | 13 | 12 | A14 | A15 | RX3 | TX3 | RST | AREF | RX2 | TX2 | 52 | 53 | RX1 | TX1 | 50 | 51 | SCL | SDA | 48 | 49 | 25 | 27 | 29 | 31 | 33 | 35 | 37 | 39 | 41 | 43 | 22 | 46 | 23 | 47 | 24 | 26 | 28 | 30 | 32 | 34 | 36 | 38 | 40 | 42 | 44 | 45